# Altium PCB PCB_Project_Batteries_V2.PcbDoc
Units mm, origin at the board's own origin, x right, y up, seen from the top; angles counter-clockwise.
Board outline 92.15 x 89.13 mm, 2 copper layers (Top Layer, Bottom Layer); 17 components, 12 nets, 175 pads, 0 vias.
Unrouted connection lines stored in the file: 46.
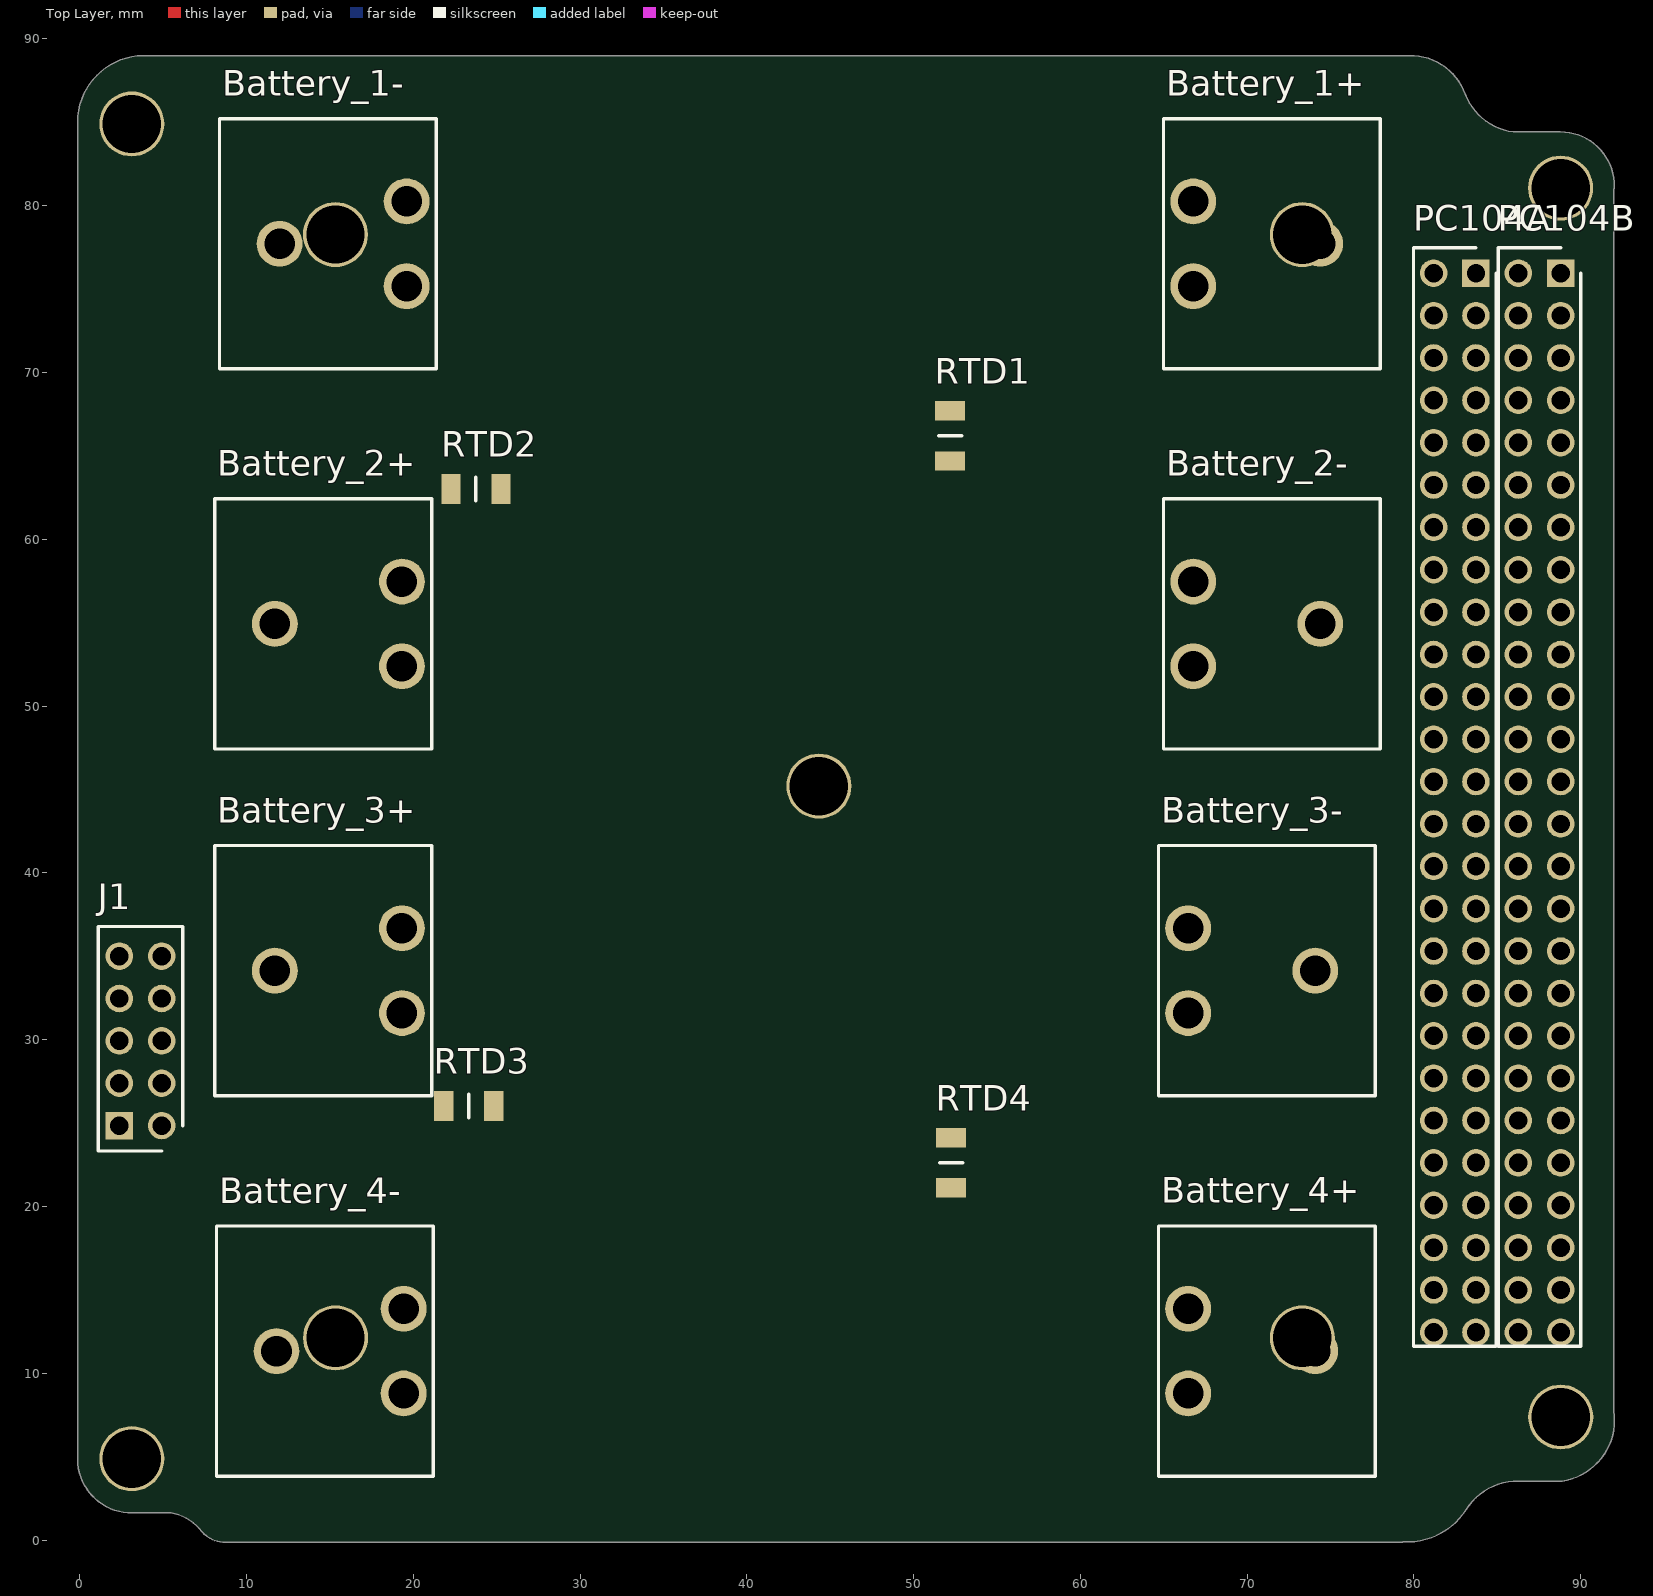
[diagram p0: Top Layer view]
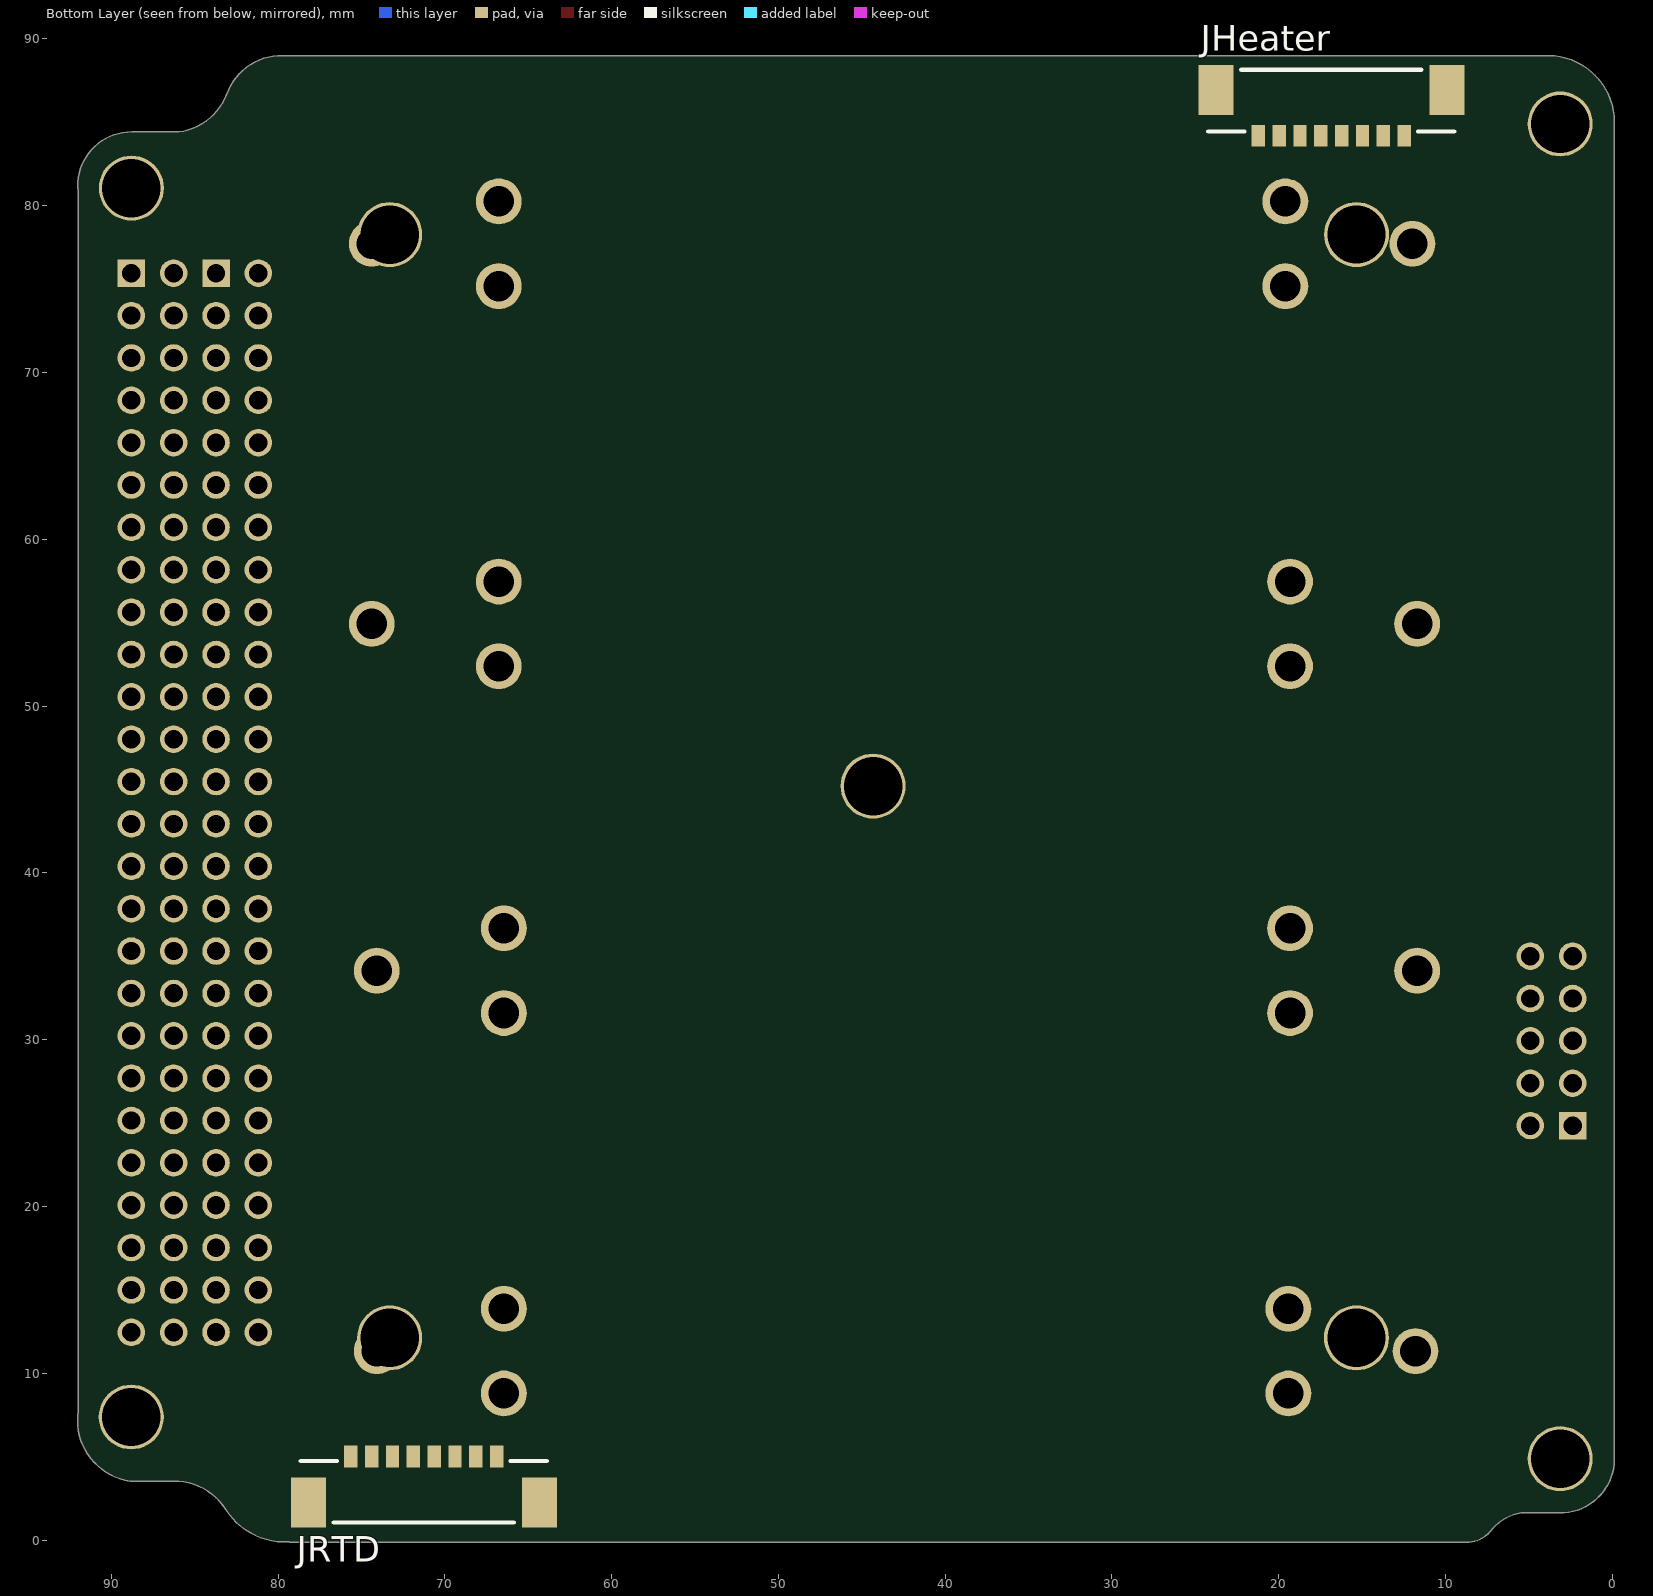
[diagram p1: Bottom Layer view, seen from below]

## Layer stack, top to bottom
Top Solder: solder mask 0.0102, Solder Resist, Dk 3.5
Top Layer: signal copper 0.0356
Dielectric 1: dielectric 0.32, FR-4, Dk 4.8
Bottom Layer: signal copper 0.0356
Bottom Solder: solder mask 0.0102, Solder Resist, Dk 3.5

## Board outline
92.004,81.131 92.003,81.056 cw(c91.907,81.053) 91.98,80.99 91.98,7.734 cw(c88.338,7.193) 92.02,7.191 cw(c88.316,7.191) 88.869,3.528 88.85,3.527 85.955,3.527 ccw(c86.222,-0.12) 83.133,1.837 cw(c79.593,4.08) 79.349,-0.104 cw(c79.275,0.003) 79.275,-0.127 8.726,-0.127 cw(c8.704,1.69) 7.33,0.501 ccw(c4.991,-1.263) 5.47,1.627 3.15,1.627 cw(c3.123,4.877) -0.127,4.853 -0.128,85.004 cw(c-0.033,85.004) -0.124,85.033 cw(c3.884,84.999) 3.799,89.006 3.825,89.007 79.724,89.007 cw(c79.778,85.51) 83.07,86.689 ccw(c86.414,87.986) 85.946,84.43 88.78,84.43 cw(c88.78,81.205)

## Design rules (kind name [scope] priority, off if disabled: settings)
Clearance [All] p1: gap=0.254 ignorepadtopadclearanceinfootprint=FALSE except(0: Arc-Hole Track-Hole SMDPad-Hole THPad-Hole Via-Hole Fill-Hole Poly-Hole Region-Hole Text-Hole)
PolygonConnect [All] p1: connectstyle=Relief reliefconductorwidth=0.254 reliefentries=4 polygonreliefangle="90 Angle" airgapwidth=0.254
RoutingVias [All] p1: holewidth=0.711 width=1.27 viastyle="Through Hole" minholewidth=0.711 minwidth=1.27 maxholewidth=0.711 maxwidth=1.27
SolderMaskExpansion [All] p1: expansion=0.102
Width [All] p1: maxlimit=0.254 minlimit=0.254 preferedwidth=0.254
30 further rules are at their usual default settings.

## Components (designator, comment, footprint, x,y, rotation, side; value= is the part's Value field where it differs from the comment)
Battery_1+ "54" 54 64.983,77.72 r180 top
Battery_1- "54" 54 21.384,77.72 r0 top
Battery_2+ "54" 54 21.104,54.931 r0 top
Battery_2- "54" 54 64.983,54.931 r180 top
Battery_3+ "54" 54 21.104,34.14 r0 top
Battery_3- "54" 54 64.677,34.14 r180 top
Battery_4+ "54" 54 64.677,11.33 r180 top
Battery_4- "54" 54 21.201,11.33 r0 top
J1 "IPT1-105-01-L-D" RHDR10W64P254_2X5_1321X508X635P 4.92,24.85 r90 top
JHeater "53398-0871" 53398-0871 16.851,84.454 r0 bottom
JRTD "53398-0871" 53398-0871 71.261,4.748 r180 bottom locked
PC104A "ESQ-126-39-G-D" SHDR52W64P254_2X26_6550X495X1384P 83.716,75.956 r90 top locked
PC104B "ESQ-126-39-G-D" SHDR52W64P254_2X26_6550X495X1384P 88.796,75.956 r90 top locked
RTD1 "32207595" THRMC3216X70N 52.19,66.206 r270 top
RTD2 "32207595" THRMC3216X70N 23.755,63.023 r180 top
RTD3 "32207595" THRMC3216X70N 23.325,26.03 r180 top
RTD4 "32207595" THRMC3216X70N 52.253,22.627 r90 top

## Footprints (in the part's own frame and the unit in brackets; to place one, negate y for a bottom-side part, rotate by r counter-clockwise, add the part's x,y. Pads: shape width x height; smd on the part's side, far side on the other; paste and mask are expansions set on the pad)
54 [mm]
  round 2.75 hole 1.83: 1(-1.78,2.54) 2(-1.78,-2.54) 3(-9.4,0)
  silkscreen extent -13,-7.5 0,7.5
53398-0871 [mm]
  rect 0.8x1.3 smd: 1(-4.375,0.258) 2(-3.125,0.258) 3(-1.875,0.258) 4(-0.625,0.258) 5(0.625,0.258) 6(1.875,0.258) 7(3.125,0.258) 8(4.375,0.258)
  rect 2.1x3 smd: 9(-6.925,-2.492) 10(6.925,-2.492)
  silkscreen extent -7.37,-3.7 7.37,0, body extent -7.57,-3.85 7.57,0.35, height 4.3
RHDR10W64P254_2X5_1321X508X635P [mm]
  round 1.65 hole 1.1: 1(0,0) 3(2.54,0) 4(2.54,2.54) 5(5.08,0) 6(5.08,2.54) 7(7.62,0) 8(7.62,2.54) 9(10.16,0) 10(10.16,2.54)
  rect 1.65x1.65 hole 1.1: 2(0,2.54)
  silkscreen extent -1.52,-1.27 11.93,3.81, body extent -1.52,-1.27 11.68,3.81, height 6.35
SHDR52W64P254_2X26_6550X495X1384P [mm]
  rect 1.65x1.65 hole 1.1: 1(0,0)
  round 1.65 hole 1.1: 2(0,2.54) 3(-2.54,0) 4(-2.54,2.54) 5(-5.08,0) 6(-5.08,2.54) 7(-7.62,0) 8(-7.62,2.54) 9(-10.16,0) 10(-10.16,2.54) 11(-12.7,0) 12(-12.7,2.54) 13(-15.24,0) 14(-15.24,2.54) 15(-17.78,0) 16(-17.78,2.54) 17(-20.32,0) 18(-20.32,2.54) 19(-22.86,0) 20(-22.86,2.54) 21(-25.4,0) 22(-25.4,2.54) 23(-27.94,0) 24(-27.94,2.54) 25(-30.48,0) 26(-30.48,2.54) 27(-33.02,0) 28(-33.02,2.54) 29(-35.56,0) 30(-35.56,2.54) 31(-38.1,0) 32(-38.1,2.54) 33(-40.64,0) 34(-40.64,2.54) 35(-43.18,0) 36(-43.18,2.54) 37(-45.72,0) 38(-45.72,2.54) 39(-48.26,0) 40(-48.26,2.54) 41(-50.8,0) 42(-50.8,2.54) 43(-53.34,0) 44(-53.34,2.54) 45(-55.88,0) 46(-55.88,2.54) 47(-58.42,0) 48(-58.42,2.54) 49(-60.96,0) 50(-60.96,2.54) 51(-63.5,0) 52(-63.5,2.54)
  silkscreen extent -64.33,-1.2 1.52,3.74
THRMC3216X70N [mm]
  rect 1.15x1.8 smd: 1(-1.5,0) 2(1.5,0)
  silkscreen extent 0,-0.7 0,0.7, body extent -1.6,-0.8 1.6,0.8, height 0.7

## Part data
Battery_1+ Battery_1- Battery_2+ Battery_2- Battery_3+ Battery_3- Battery_4+ Battery_4-: "Battery", Manufacturer_Name="Keystone Electronics", Mouser Part Number=534-54, Allied_Number=70229904, Allied Price/Stock=http://www.alliedelec.com/keystone-electronics-54/70229904/, Datasheet Link=http://www.farnell.com/datasheets/1703960.pdf, Manufacturer_Part_Number=54, Mouser Price/Stock=https://www.mouser.co.uk/ProductDetail/Keystone-Electronics/54?qs=73q%2FgRcW4F3NakoJDesViw%3D%3D
J1: "Connector", Manufacturer_Name=SAMTEC, Datasheet Link=http://suddendocs.samtec.com/prints/ipt1-1xx-xx-xx-d-xx-mkt.pdf, Height=6.35mm, Manufacturer_Part_Number=IPT1-105-01-L-D
JHeater JRTD: "Connector", Manufacturer_Name=Molex, Mouser2 Part Number=538-53398-0871, Datasheet Link=https://componentsearchengine.com/Datasheets/1/53398-0871.pdf, Manufacturer_Part_Number=53398-0871, Mouser2 Price/Stock=https://www.mouser.com/Search/Refine.aspx?Keyword=538-53398-0871
PC104A PC104B: "Connector", Manufacturer_Name=SAMTEC, Mouser Part Number=200-ESQ12639GD, RS Part Number=1595654, Datasheet Link=http://suddendocs.samtec.com/catalog_english/esq_th.pdf, Height=13.84mm, Manufacturer_Part_Number=ESQ-126-39-G-D, Mouser Price/Stock=https://www.mouser.co.uk/ProductDetail/Samtec/ESQ-126-39-G-D?qs=Cqqh%252BS766wm7W672HSOlSA%3D%3D, RS Price/Stock=http://uk.rs-online.com/web/p/products/1595654
RTD1 RTD2 RTD3 RTD4: "Integrated Circuit", Manufacturer_Name="Heraeus Nexensos", Datasheet Link=https://componentsearchengine.com/Datasheets/1/32207595.pdf, Height=0.7mm, Manufacturer_Part_Number=32207595

## Free pads (board coordinates)
  round 3.9 hole 3.5: 0(3.125,4.879) 0(15.336,78.276) 0(73.302,12.125) 0(88.791,81.058) 3(3.125,84.904) 5(88.8,7.379) 8(15.339,12.125) 10(73.302,78.267) 11(44.321,45.207)

## Nets (pads, with @x,y where several pads share a name; then routed paths per layer and width w, separated by ;. In a path a pad name is that pad's centre, name@x,y a point inside that pad or via, vN(x,y) a via of type N, cw(c..) or ccw(c..) an arc to the next point about the centre after c; other vN are vias at no path point)
+1VBat: Battery_1+.1 Battery_1+.2 Battery_1+.3 Battery_2-.1 Battery_2-.2 Battery_2-.3 J1.9 J1.10
+2VBat: Battery_2+.1 Battery_2+.2 Battery_2+.3 Battery_3+.1 Battery_3+.2 Battery_3+.3 J1.1 J1.2 J1.3 J1.4
+4VBat: Battery_3-.1 Battery_3-.2 Battery_3-.3 Battery_4+.1 Battery_4+.2 Battery_4+.3
-1VBat: Battery_1-.1 Battery_1-.2 Battery_1-.3 Battery_4-.1 Battery_4-.2 Battery_4-.3 J1.5 J1.6 J1.7 J1.8
-Heater1_Voltage: JHeater.3 JHeater.4
-Heater2_Voltage: JHeater.7 JHeater.8
RTD0: JRTD.8 RTD1.1
RTD1: JRTD.6 RTD2.1
RTD4: JRTD.4 RTD3.1
RTD5: JRTD.2 RTD4.1
RTD_Common: JRTD.1 JRTD.3 JRTD.5 JRTD.7 RTD1.2 RTD2.2 RTD3.2 RTD4.2
VBus: JHeater.1 JHeater.2 JHeater.5 JHeater.6
pads on no net: JHeater.9 JHeater.10 JRTD.9 JRTD.10 PC104A.1 PC104A.2 PC104A.3 PC104A.4 PC104A.5 PC104A.6 PC104A.7 PC104A.8 PC104A.9 PC104A.10 PC104A.11 PC104A.12 PC104A.13 PC104A.14 PC104A.15 PC104A.16 PC104A.17 PC104A.18 PC104A.19 PC104A.20 PC104A.21 PC104A.22 PC104A.23 PC104A.24 PC104A.25 PC104A.26 PC104A.27 PC104A.28 PC104A.29 PC104A.30 PC104A.31 PC104A.32 PC104A.33 PC104A.34 PC104A.35 PC104A.36 PC104A.37 PC104A.38 PC104A.39 PC104A.40 PC104A.41 PC104A.42 PC104A.43 PC104A.44 PC104A.45 PC104A.46 PC104A.47 PC104A.48 PC104A.49 PC104A.50 PC104A.51 PC104A.52 PC104B.1 PC104B.2 PC104B.3 PC104B.4 PC104B.5 PC104B.6 PC104B.7 PC104B.8 PC104B.9 PC104B.10 PC104B.11 PC104B.12 PC104B.13 PC104B.14 PC104B.15 PC104B.16 PC104B.17 PC104B.18 PC104B.19 PC104B.20 PC104B.21 PC104B.22 PC104B.23 PC104B.24 PC104B.25 PC104B.26 PC104B.27 PC104B.28 PC104B.29 PC104B.30 PC104B.31 PC104B.32 PC104B.33 PC104B.34 PC104B.35 PC104B.36 PC104B.37 PC104B.38 PC104B.39 PC104B.40 PC104B.41 PC104B.42 PC104B.43 PC104B.44 PC104B.45 PC104B.46 PC104B.47 PC104B.48 PC104B.49 PC104B.50 PC104B.51 PC104B.52